# Altium PCB Power_Module_(Type-A).PcbDoc
Units mm, origin at the board's own origin, x right, y up, seen from the top; angles counter-clockwise.
Board outline 59.75 x 29 mm, 4 copper layers (L1 (Sig), L2 (GND), L3 (PWR), L4 (Sig)), stack 1.57 mm thick; 55 components, 25 nets, 271 pads, 150 vias.
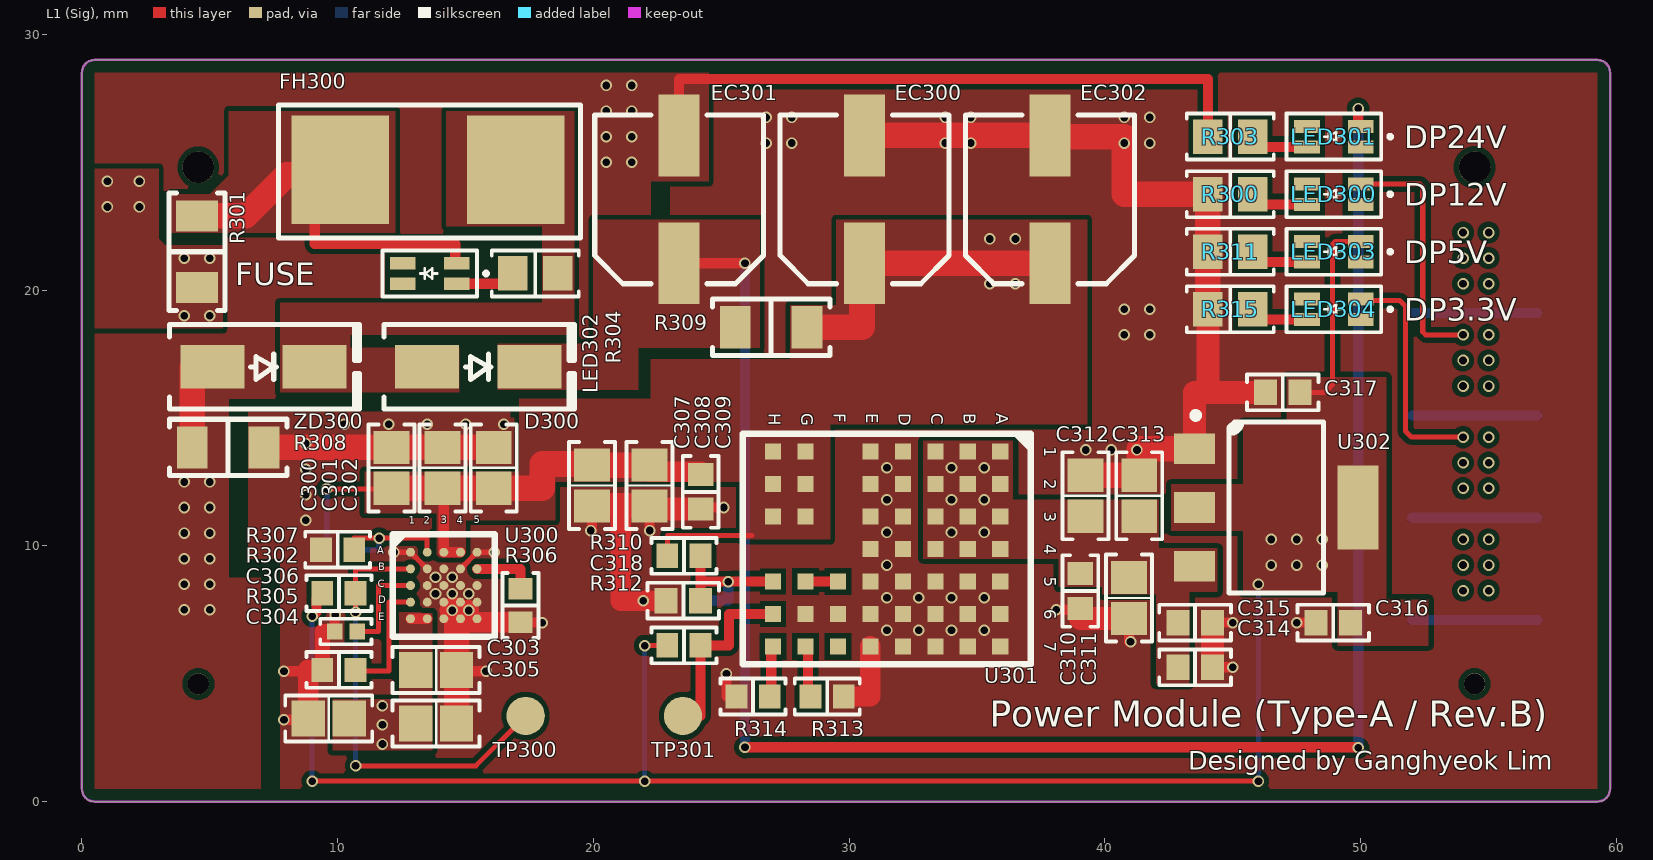
[diagram p0: L1 (Sig) view]
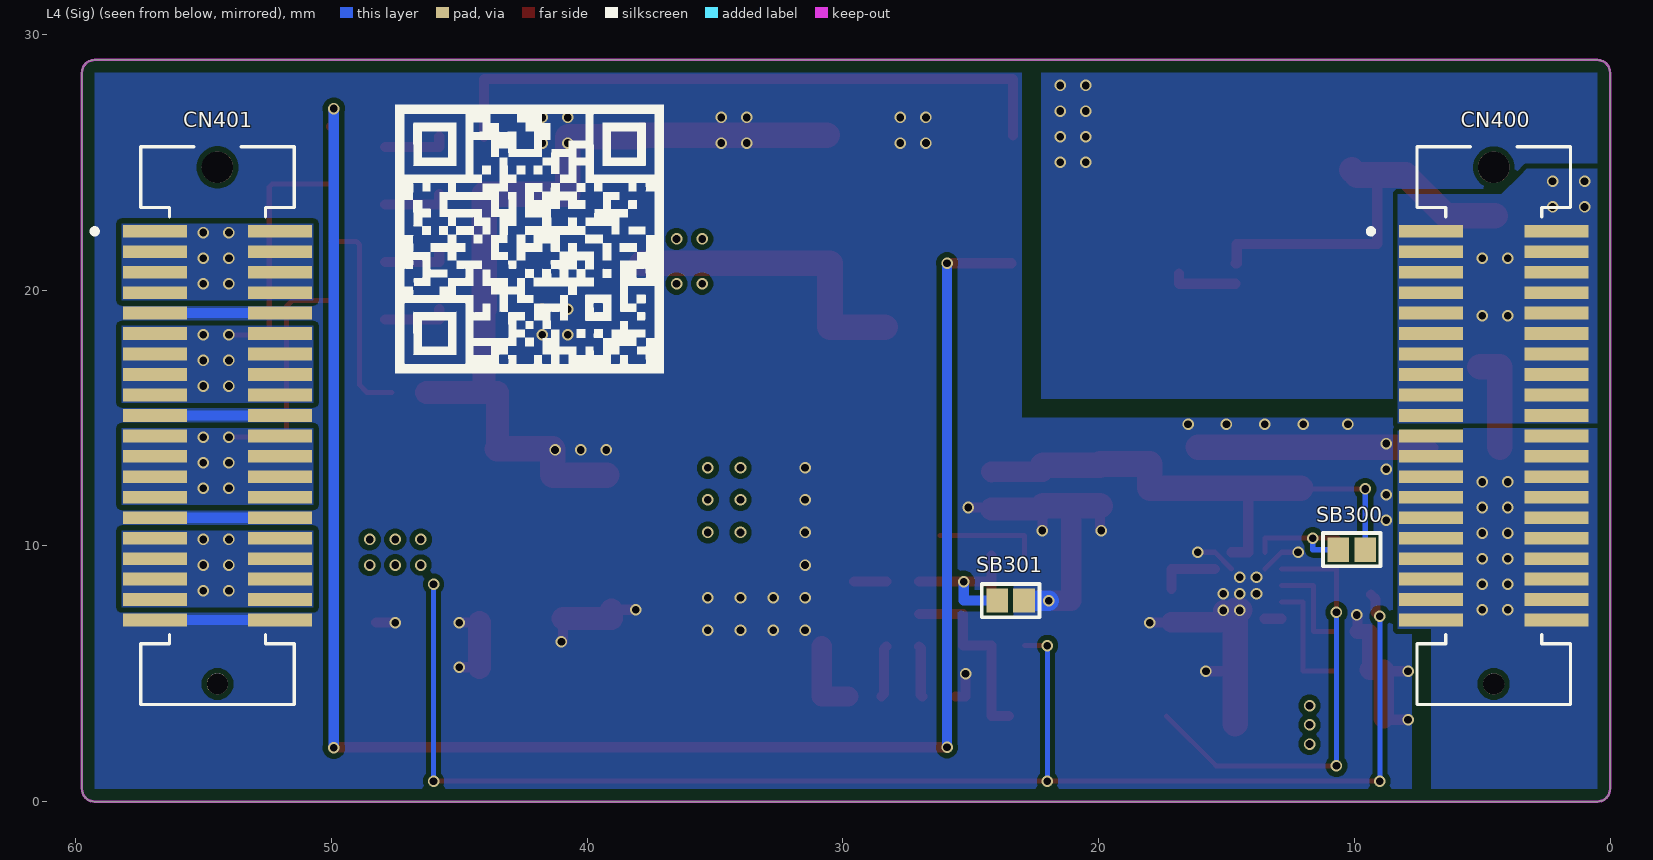
[diagram p1: L4 (Sig) view, seen from below]
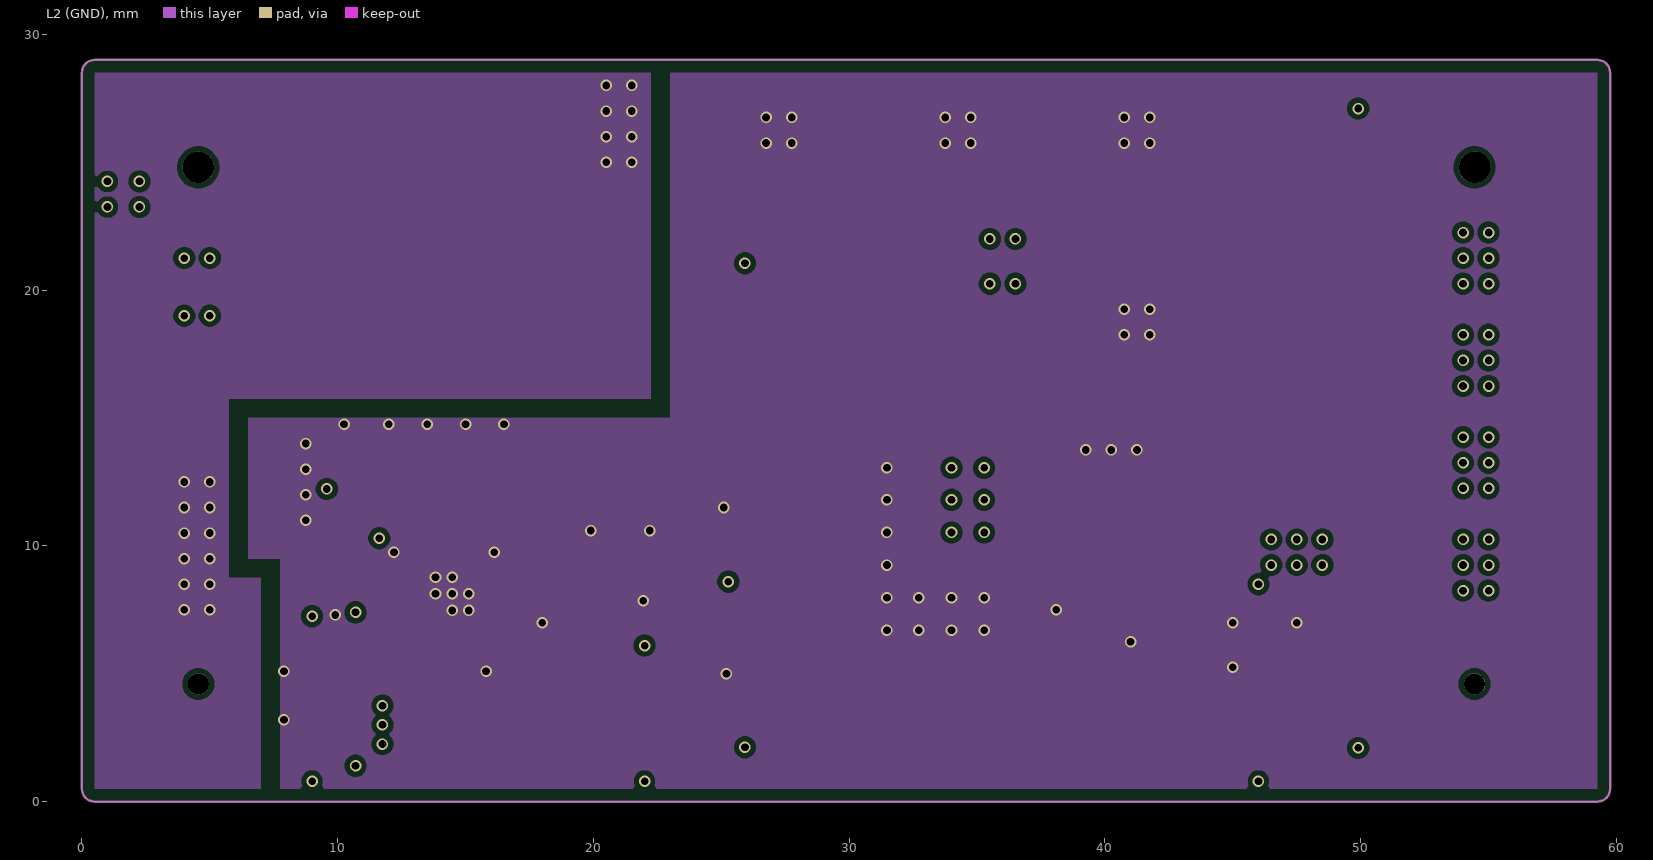
[diagram p2: L2 (GND)]
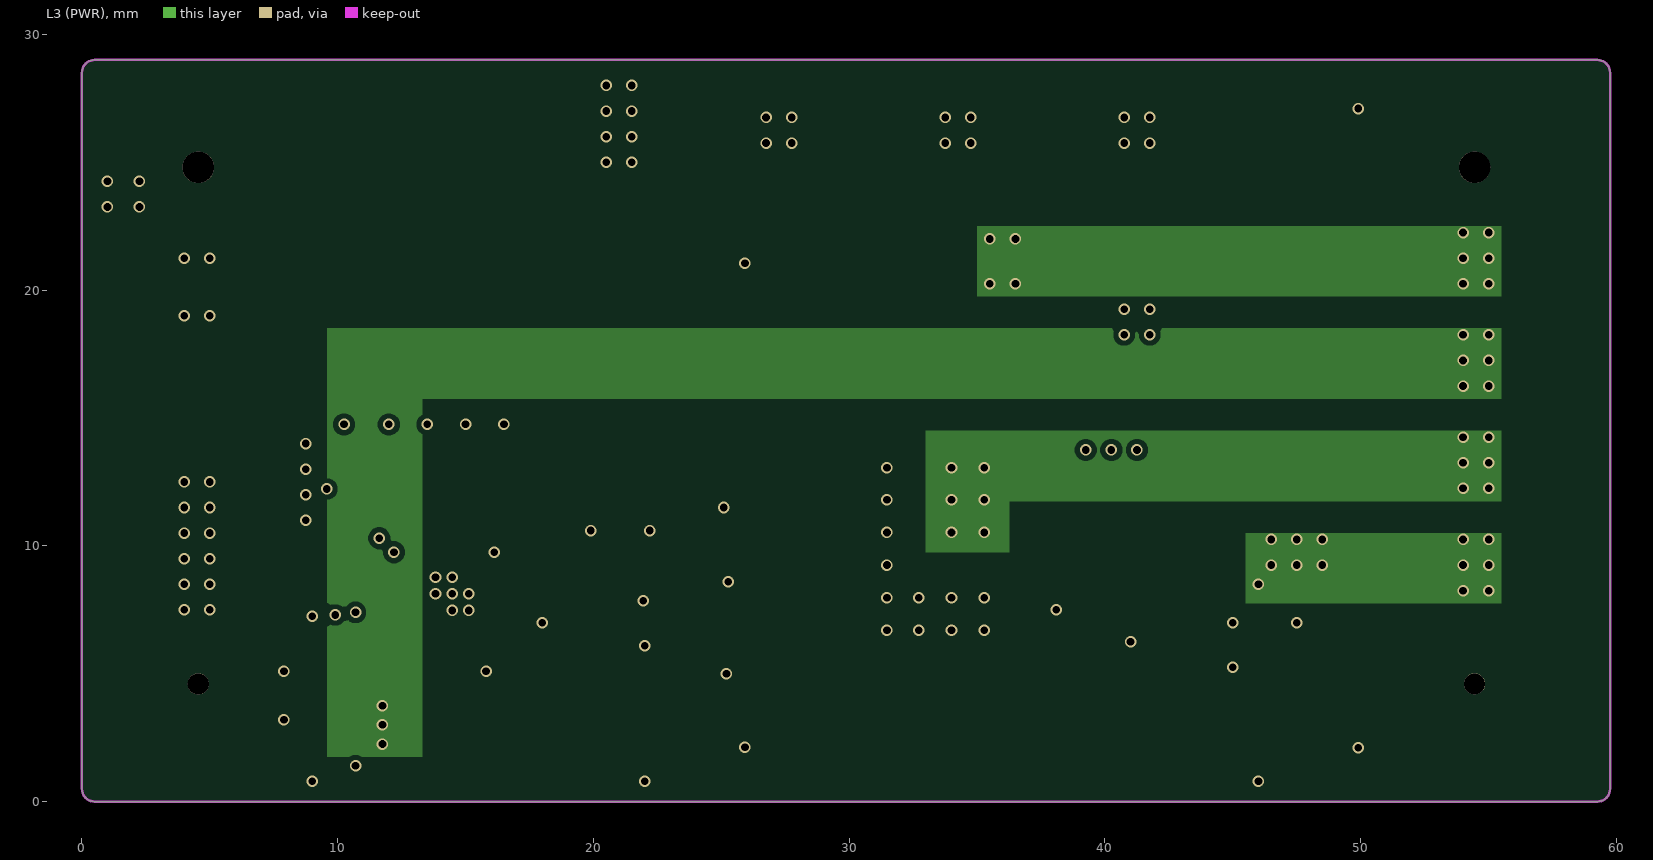
[diagram p3: L3 (PWR)]
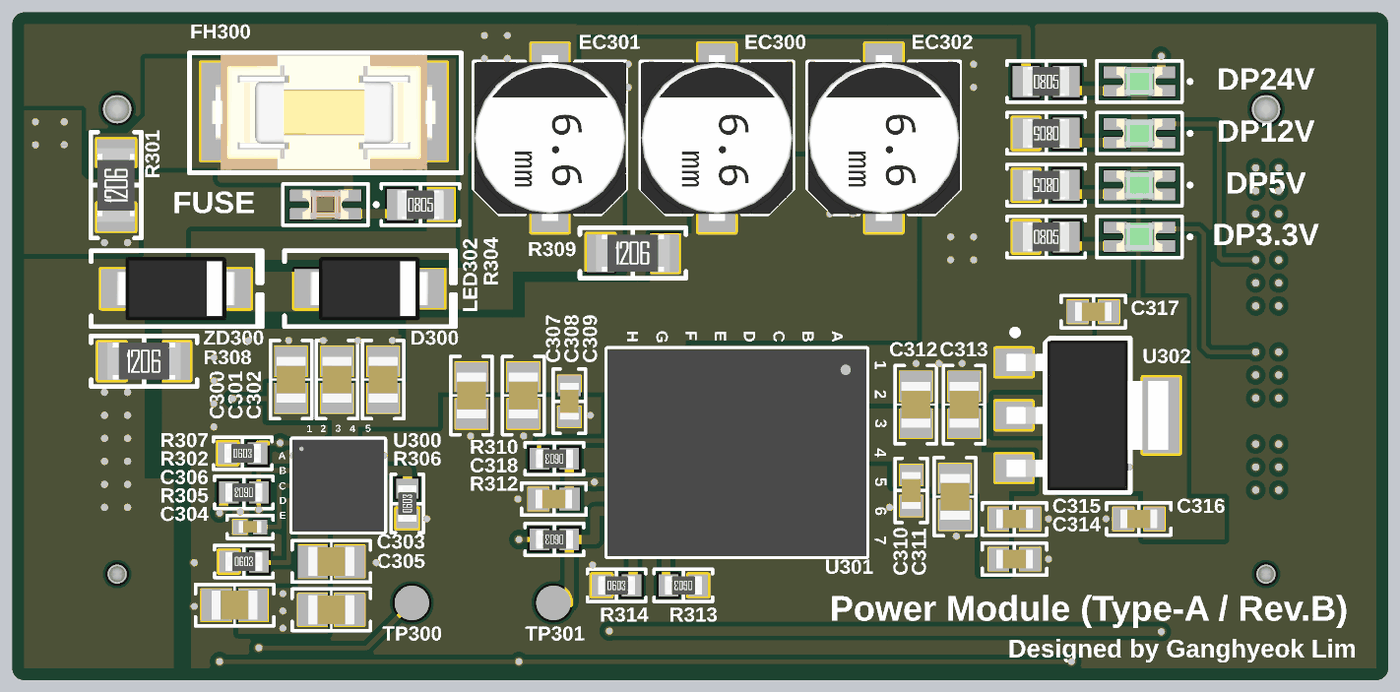
[diagram p4: 3D render of the assembled board from above, using the file's embedded part models]

## Layer stack, top to bottom
Top Mask: solder mask 0.015, Solder Resist, Dk 3.8
L1 (Sig): signal copper 0.035
Dielectric 1: prepreg 0.2, 7628, Dk 4.6
L2 (GND): signal copper 0.0175
Core: core 1.065, FR-4, Dk 4.5
L3 (PWR): signal copper 0.0175
Dielectric 2: prepreg 0.2, 7628, Dk 4.6
L4 (Sig): signal copper 0.035
Bottom Mask: solder mask 0.015, Solder Resist, Dk 3.8

## Board outline
0.5,0 cw(c0.5,0.5) 0,0.5 0,28.5 cw(c0.5,28.5) 0.5,29 59.25,29 cw(c59.25,28.5) 59.75,28.5 59.75,0.5 cw(c59.25,0.5) 59.25,0

## Design rules (kind name [scope] priority, off if disabled: settings)
BoardOutlineClearance [All] p1: gap=0.2 ignorepadtopadclearanceinfootprint=FALSE except(0.4: Arc-SplitBarrior Arc-SplitContinuation Track-SplitBarrior Track-SplitContinuation SMDPad-SplitBarrior SMDPad-SplitContinuation THPad-SplitBarrior THPad-SplitContinuation Via-SplitBarrior Via-SplitContinuation Fill-SplitBarrior Fill-SplitContinuation Poly-SplitBarrior Poly-SplitContinuation Region-SplitBarrior Region-SplitContinuation Text-SplitBarrior Text-SplitContinuation)
Clearance "Clearance Bottom Layer" [OnLayer('Bottom Layer')] p1: gap=0.203 ignorepadtopadclearanceinfootprint=TRUE except(0.254: Arc-Text Track-Text SMDPad-Text THPad-Text Via-Text Fill-Text Poly-Text Region-Text Text-Text)
Clearance "Clearance Top Layer" [OnLayer('Top Layer')] p2: gap=0.203 ignorepadtopadclearanceinfootprint=TRUE except(0.254: Arc-Text Track-Text SMDPad-Text THPad-Text Via-Text Fill-Text Poly-Text Region-Text Text-Text)
Clearance [All] p3: gap=0.2 ignorepadtopadclearanceinfootprint=FALSE except(0.089: Arc-Arc Arc-Track Arc-SMDPad Track-Track Track-SMDPad SMDPad-SMDPad; 0.127: Arc-Via Track-Via SMDPad-Via THPad-Via Via-Via; 0.254: Arc-Text Track-Text SMDPad-Text THPad-Text Via-Text Fill-Text Poly-Text Region-Text Text-Text)
HoleSize [All] p1: absolutevalues=TRUE maxlimit=6.3 minlimit=0.2 maxpercent=80.000 minpercent=20.000
MinimumAnnularRing [All] p1: minimumring=0.076
MinimumSolderMaskSliver [All] p1: minsoldermaskwidth=0.1
PolygonConnect FUSE_IN [InNet('FUSE_IN')] p1: connectstyle=Direct reliefconductorwidth=0.254 reliefentries=4 polygonreliefangle="90 Angle" airgapwidth=0.254
PolygonConnect P24VS_L1 [InNet('P24VS')] p2: connectstyle=Direct reliefconductorwidth=0.254 reliefentries=4 polygonreliefangle="90 Angle" airgapwidth=0.254
PolygonConnect FUSE_OUT [InNet('FUSE_OUT')] p3: connectstyle=Direct reliefconductorwidth=0.254 reliefentries=4 polygonreliefangle="90 Angle" airgapwidth=0.254
PolygonConnect GNDPWR [InNet('GNDPWR')] p4: connectstyle=Direct reliefconductorwidth=0.254 reliefentries=4 polygonreliefangle="90 Angle" airgapwidth=0.254
PolygonConnect IN24VS [InNet('IN24VS')] p5: connectstyle=Direct reliefconductorwidth=0.254 reliefentries=4 polygonreliefangle="90 Angle" airgapwidth=0.254
PolygonConnect DP12VS [InNet('DP12VS')] p6: connectstyle=Direct reliefconductorwidth=0.254 reliefentries=4 polygonreliefangle="90 Angle" airgapwidth=0.254
PolygonConnect DP3.3VS [InNet('DP3.3VS')] p7: connectstyle=Direct reliefconductorwidth=0.254 reliefentries=4 polygonreliefangle="90 Angle" airgapwidth=0.254
PolygonConnect DP5VS [InNet('DP5VS')] p8: connectstyle=Direct reliefconductorwidth=0.254 reliefentries=4 polygonreliefangle="90 Angle" airgapwidth=0.254
PolygonConnect DGND [InNet('DGND')] p9: connectstyle=Direct reliefconductorwidth=0.254 reliefentries=4 polygonreliefangle="90 Angle" airgapwidth=0.254
PolygonConnect DP24VS [InNet('DP24VS')] p10: connectstyle=Direct reliefconductorwidth=0.254 reliefentries=4 polygonreliefangle="90 Angle" airgapwidth=0.254
PolygonConnect [All] p11: thpad.connectstyle=Relief thpad.reliefconductorwidth=0.508 thpad.reliefentries=4 thpad.polygonreliefangle="90 Angle" thpad.airgapwidth=0.254 smdpad.connectstyle=Relief smdpad.reliefconductorwidth=0.508 smdpad.reliefentries=4 smdpad.polygonreliefangle="90 Angle" smdpad.airgapwidth=0.254 via.connectstyle=Direct via.reliefconductorwidth=0.508 via.reliefentries=4 via.polygonreliefangle="90 Angle" via.airgapwidth=0.254
RoutingCorners [All] p1: cornerstyle=Round minsetback=2.54 maxsetback=2.54
RoutingVias [All] p1: holewidth=0.3 width=0.45 viastyle="Through Hole" minholewidth=0.15 minwidth=0.3 maxholewidth=1 maxwidth=2
SilkToSilkClearance [All] p1: silktosilkclearance=0.1
SilkToSolderMaskClearance [IsPad] p1: minsilkscreentomaskgap=0.1 clearancetoexposedcopper=TRUE
SolderMaskExpansion [All] p1: expansion=0.102 istentingtop=FALSE
Width [All] p1: maxlimit=2 minlimit=0.1 preferedwidth=0.2
25 further rules are at their usual default settings.

## Components (designator, comment, footprint, x,y, rotation, side; value= is the part's Value field where it differs from the comment)
C300 "10uF/50V/2012" "CAP 2012 (0805_INCH)" 12.1,13.05 r270 top
C301 "2.2uF/50V/2012" "CAP 2012 (0805_INCH)" 14.1,13.05 r270 top
C302 "100nF/50V/2012" "CAP 2012 (0805_INCH)" 16.1,13.05 r270 top
C303 "100nF/50V/2012" "CAP 2012 (0805_INCH)" 13.85,5.15 r180 top
C304 "2.2uF/50V/2012" "CAP 2012 (0805_INCH)" 9.65,3.25 r0 top
C305 "10uF/50V/2012" "CAP 2012 (0805_INCH)" 13.85,3.05 r180 top
C306 "100nF/16V/1005" "CAP 1005 (0402_INCH)" 10.32,6.65 r0 top
C307 "10uF/35V/2012" "CAP 2012 (0805_INCH)" 19.94,12.36 r90 top
C308 "2.2uF/50V/2012" "CAP 2012 (0805_INCH)" 22.19,12.36 r90 top
C309 "100nF/50V/1608" "CAP 1608 (0603_INCH)" 24.19,12.11 r90 top
C310 "100nF/50V/1608" "CAP 1608 (0603_INCH)" 39.04,8.235 r90 top
C311 "10uF/35V/2012" "CAP 2012 (0805_INCH)" 40.94,7.96 r90 top
C312 "10uF/35V/2012" "CAP 2012 (0805_INCH)" 39.24,11.96 r270 top
C313 "10uF/35V/2012" "CAP 2012 (0805_INCH)" 41.34,11.96 r270 top
C314 "10uF/10V/1608" "CAP 1608 (0603_INCH)" 43.525,5.25 r180 top
C315 "100nF/50V/1608" "CAP 1608 (0603_INCH)" 43.525,7 r180 top
C316 "100nF/50V/1608" "CAP 1608 (0603_INCH)" 48.925,7 r0 top
C317 "10uF/10V/1608" "CAP 1608 (0603_INCH)" 46.95,16 r0 top
C318 "100nF/50V/1608" "CAP 1608 (0603_INCH)" 23.515,7.86 r0 top
CN400 "10144517-041802LF" CON_BergStak-Lite(0.8mm)_MALE-40P(10144517-041802LF)_HandSolder 4.55,14.7 r90 bottom locked
CN401 "10144517-041802LF" CON_BergStak-Lite(0.8mm)_MALE-40P(10144517-041802LF)_HandSolder 54.45,14.7 r90 bottom locked
D300 "SS34" "DIO DO-214AC (SMA)" 15.5,17 r0 top
EC300 "100uF/35V/6.3Øx7.7" "CAP ALSMD 6.6MM H7.7MM" 30.6,23.55 r90 top
EC301 "100uF/35V/6.3Øx7.7" "CAP ALSMD 6.6MM H7.7MM" 23.35,23.55 r90 top
EC302 "100uF/35V/6.3Øx7.7" "CAP ALSMD 6.6MM H7.7MM" 37.85,23.55 r90 top
FH300 "01550900M" "FUSE 01550900M_SMD" 10.1,24.7 r0 top
LED300 "GREEN/2012" "LED MHT170RGBCT (GREEN)" 48.95,23.75 r180 top
LED301 "GREEN/2012" "LED MHT170RGBCT (GREEN)" 48.95,26 r180 top
LED302 "RED/2012" "LED MHT170RGBCT (RED)" 13.6,20.65 r180 top
LED303 "GREEN/2012" "LED MHT170RGBCT (GREEN)" 48.95,21.5 r180 top
LED304 "GREEN/2012" "LED MHT170RGBCT (GREEN)" 48.95,19.25 r180 top
R300 "680R/2012" "RES 2012 (0805_inch)" 44.9,23.75 r180 top value=680R
R301 "0R/3216" "RES 3216 (1206_inch)" 4.5,21.5 r90 top
R302 "100K/1608" "RES 1608 (0603_inch)" 10.05,8.15 r180 top value=100K
R303 "4.7K/2012" "RES 2012 (0805_inch)" 44.9,26 r0 top value=4.7K
R304 "4.7K/2012" "RES 2012 (0805_inch)" 17.725,20.65 r0 top value=4.7K
R305 "17.4K/1608" "RES 1608 (0603_inch)" 10.05,5.15 r0 top value=17.4K
R306 "18.2K/1608" "RES 1608 (0603_inch)" 17.15,7.668 r90 top value=18.2K
R307 "10K/1608" "RES 1608 (0603_inch)" 10,9.85 r0 top value=10K
R308 "0R/3216" "RES 3216 (1206_inch)" 5.717,13.85 r0 top
R309 "0R/3216" "RES 3216 (1206_inch)" 26.95,18.55 r0 top
R310 "15K/1608" "RES 1608 (0603_inch)" 23.54,9.61 r180 top value=15K
R311 "330R/2012" "RES 2012 (0805_inch)" 44.9,21.5 r180 top value=330R
R312 "100K/1608" "RES 1608 (0603_inch)" 23.54,6.11 r180 top value=100K
R313 "39.2K/1608" "RES 1608 (0603_inch)" 29.14,4.11 r180 top value=39.2K
R314 "93.1K/1608" "RES 1608 (0603_inch)" 26.24,4.11 r0 top value=93.1K
R315 "680R/2012" "RES 2012 (0805_inch)" 44.9,19.25 r0 top value=680R
SB300 "SB" "SB (Solder-Bridge)" 10.1,9.85 r180 bottom
SB301 "SB" "SB (Solder-Bridge)" 23.44,7.86 r0 bottom
TP300 "TP_CIRCLE" "TP Circle" 17.35,3.35 r90 top
TP301 "TP_CIRCLE" "TP Circle" 23.5,3.35 r90 top
U300 "LTM8074IY#PBF" IC_BGA-25 14.15,8.45 r270 top
U301 "LTM8023EV#PBF" "LGA-50 (LTM8023EV#PBF)" 31.465,9.88 r180 top
U302 "AMS1117-3.3" "SOT 223-3 (DIODES INCORPORATED)" 46.7,11.5 r0 top
ZD300 "SMAJ24A" "DIO DO-214AC (SMA)" 7.1,17 r0 top

## Footprints (in the part's own frame and the unit in brackets; to place one, negate y for a bottom-side part, rotate by r counter-clockwise, add the part's x,y. Pads: shape width x height; smd on the part's side, far side on the other; paste and mask are expansions set on the pad)
"CAP 1005 (0402_INCH)" [mm] "Chip Capacitor, 2-Leads, Body 1.02x0.51mm, IPC Medium Density"
  rect 0.6x0.64 smd mask+0.04: 1(-0.44,0) 2(0.44,0)
  silkscreen extent -1,-0.5 1,0.5, body extent -0.5,-0.26 0.5,0.26, height 0.52
"CAP 1608 (0603_INCH)" [mm] "Chip Capacitor, 2-Leads, Body 1.60x0.80mm, IPC Medium Density"
  rect 0.9x1 smd mask+0.04: 1(-0.675,0) 2(0.675,0)
  silkscreen extent -1.4,-0.7 1.4,0.7, body extent -0.8,-0.41 0.8,0.41, height 0.82
"CAP 2012 (0805_INCH)" [mm] "Chip Capacitor, 2-Leads, Body 2.00x1.20mm, IPC Medium Density"
  rect 1.3x1.4 smd mask+0.04: 1(-0.8,0) 2(0.8,0)
  silkscreen extent -1.7,-0.9 1.7,0.9, body extent -1,-0.64 1,0.64, height 1.26
"CAP ALSMD 6.6MM H7.7MM" [mm] "Aluminum Electrolytic Capacitor, Body 6.60x6.60x7.70mm, IPC Low Density"
  rect 3.2x1.6 smd: 1(-2.5,0) 2(2.5,0)
  silkscreen extent -3.3,-3.3 3.3,3.3, body extent -3.6,-3.3 3.6,3.3, height 7.7
CON_BergStak-Lite(0.8mm)_MALE-40P(10144517-041802LF)_HandSolder [mm]
  rect 0.5x2.5 smd: 1(7.6,2.45) 2(7.6,-2.45) 3(6.8,2.45) 4(6.8,-2.45) 5(6,2.45) 6(6,-2.45) 7(5.2,2.45) 8(5.2,-2.45) 9(4.4,2.45) 10(4.4,-2.45) 11(3.6,2.45) 12(3.6,-2.45) 13(2.8,2.45) 14(2.8,-2.45) 15(2,2.45) 16(2,-2.45) 17(1.2,2.45) 18(1.2,-2.45) 19(0.4,2.45) 20(0.4,-2.45) 21(-0.4,2.45) 22(-0.4,-2.45) 23(-1.2,2.45) 24(-1.2,-2.45) 25(-2,2.45) 26(-2,-2.45) 27(-2.8,2.45) 28(-2.8,-2.45) 29(-3.6,2.45) 30(-3.6,-2.45) 31(-4.4,2.45) 32(-4.4,-2.45) 33(-5.2,2.45) 34(-5.2,-2.45) 35(-6,2.45) 36(-6,-2.45) 37(-6.8,2.45) 38(-6.8,-2.45) 39(-7.6,2.45) 40(-7.6,-2.45)
  round 0.83 hole 0.83 unplated: ""(-10.1,0)
  round 1.23 hole 1.23 unplated: ""(10.1,0)
  silkscreen extent -10.9,-3 10.9,4.9, body extent -10.9,-3 10.9,3, height 3.65
"DIO DO-214AC (SMA)" [mm] "Molded Diode, 2-Leads, Body 4.30x2.60mm, IPC Medium Density"
  rect 2.5x1.7 smd: 1(-2,0) 2(2,0)
  silkscreen extent -3.68,-1.65 3.75,1.65, body extent -2.6,-1.37 2.6,1.37, height 2.4
"FUSE 01550900M_SMD" [mm] "Fuse Holder"
  rect 3.81x4.24 smd: 1(0,0) 2(6.858,0)
  silkscreen extent -2.41,-2.67 9.4,2.54, body extent -1.42,-2.54 8.28,2.46, height 3.74
IC_BGA-25 [mm] "BGA Package  25-Lead (4mm 占쏙옙 4mm 占쏙옙 1.82mm)"
  round 0.35 smd mask+0.05: A1(-1.3,-1.3) A2(-1.3,-0.65) A3(-1.3,0) A4(-1.3,0.65) A5(-1.3,1.3) B1(-0.65,-1.3) B2(-0.65,-0.65) B3(-0.65,0) B4(-0.65,0.65) B5(-0.65,1.3) C1(0,-1.3) C2(0,-0.65) C3(0,0) C4(0,0.65) C5(0,1.3) D1(0.65,-1.3) D2(0.65,-0.65) D3(0.65,0) D4(0.65,0.65) D5(0.65,1.3) E1(1.3,-1.3) E2(1.3,-0.65) E3(1.3,0) E4(1.3,0.65) E5(1.3,1.3)
  silkscreen extent -2,-2 2,2, body extent -1.99,-1.99 1.99,1.99, height 1.98
"LED MHT170RGBCT (GREEN)" [mm] "Colorless transparence -30占쏙옙~+85占쏙옙 Positive post Common anode RGB 120占쏙옙 0805  Light Emitting Diodes (LED) ROHS"
  rect 1x0.5 smd mask+0.04: 1(-1.05,0.4) 2(1.05,0.4) 3(1.05,-0.4) 4(-1.05,-0.4)
  silkscreen extent -2.25,-0.9 1.85,0.9, body extent -1,-0.62 1,0.62, height 0.9
"LED MHT170RGBCT (RED)" [mm] "Colorless transparence -30占쏙옙~+85占쏙옙 Positive post Common anode RGB 120占쏙옙 0805  Light Emitting Diodes (LED) ROHS"
  rect 1x0.5 smd mask+0.04: 1(-1.05,0.4) 2(1.05,0.4) 3(1.05,-0.4) 4(-1.05,-0.4)
  silkscreen extent -2.25,-0.9 1.85,0.9, body extent -1,-0.62 1,0.62, height 0.9
"LGA-50 (LTM8023EV#PBF)" [mm] "LGA 50-Lead (11.25mm 占쏙옙 9.00mm 占쏙옙 2.82mm)"
  rect 0.635x0.635 smd: A1(-4.445,-3.81) A2(-4.445,-2.54) A3(-4.445,-1.27) A4(-4.445,0) A5(-4.445,1.27) A6(-4.445,2.54) A7(-4.445,3.81) B1(-3.175,-3.81) B2(-3.175,-2.54) B3(-3.175,-1.27) B4(-3.175,0) B5(-3.175,1.27) B6(-3.175,2.54) B7(-3.175,3.81) C1(-1.905,-3.81) C2(-1.905,-2.54) C3(-1.905,-1.27) C4(-1.905,0) C5(-1.905,1.27) C6(-1.905,2.54) C7(-1.905,3.81) D1(-0.635,-3.81) D2(-0.635,-2.54) D3(-0.635,-1.27) D4(-0.635,0) D5(-0.635,1.27) D6(-0.635,2.54) D7(-0.635,3.81) E1(0.635,-3.81) E2(0.635,-2.54) E3(0.635,-1.27) E4(0.635,0) E5(0.635,1.27) E6(0.635,2.54) E7(0.635,3.81) F5(1.905,1.27) F6(1.905,2.54) F7(1.905,3.81) G1(3.175,-3.81) G2(3.175,-2.54) G3(3.175,-1.27) G5(3.175,1.27) G6(3.175,2.54) G7(3.175,3.81) H1(4.445,-3.81) H2(4.445,-2.54) H3(4.445,-1.27) H5(4.445,1.27) H6(4.445,2.54) H7(4.445,3.81)
  silkscreen extent -5.65,-4.55 5.63,4.5, body extent -5.63,-4.5 5.63,4.5, height 2.98
"RES 1608 (0603_inch)" [mm] "Chip Resistor, 2-Leads, Body 1.60x0.80mm, IPC Medium Density"
  rect 0.85x0.95 smd: 1(-0.65,0) 2(0.65,0)
  silkscreen extent -1.27,-0.7 1.27,0.7, body extent -0.8,-0.4 0.8,0.4, height 0.45
"RES 2012 (0805_inch)" [mm] "Chip Resistor, 2-Leads, Body 2.00x1.25mm, IPC Medium Density"
  rect 1.15x1.35 smd: 1(-0.875,0) 2(0.875,0)
  silkscreen extent -1.7,-0.9 1.7,0.9, body extent -1,-0.62 1,0.63, height 0.6
"RES 3216 (1206_inch)" [mm] "Chip Resistor, 2-Leads, Body 3.13x1.55mm, IPC Medium Density"
  rect 1.2x1.65 smd: 1(-1.4,0) 2(1.4,0)
  silkscreen extent -2.3,-1.1 2.3,1.1, body extent -1.6,-0.8 1.6,0.8, height 0.6
"SB (Solder-Bridge)" [mm] "SB (Solder-Bridge)"
  rect 0.85x0.95 smd mask+0.038: 1(-0.525,0) 2(0.525,0)
  silkscreen extent -1.12,-0.65 1.12,0.65
"SOT 223-3 (DIODES INCORPORATED)" [mm] "SOT223, 4-Leads, Body 6.50x7.00mm (avg), Pitch 2.30mm, IPC Medium Density"
  rect 1.6x1.2 smd: 1(-3.2,2.3) 2(-3.2,0) 3(-3.2,-2.3)
  rect 1.6x3.3 smd: 4(3.2,0)
  silkscreen extent -3.27,-3.35 1.85,3.72, body extent -3.52,-3.25 3.5,3.25, height 1.8
"TP Circle" [mm] "Test Point Circle"
  round 1.5 smd: 1(0,0)

## Part data
C300 C305: library part CAP_10uF/50V/2012, "Ceramic CAP_10uF/50V/2012", JLCPCB Part Type="Basic Part", LCSC Part #=C440198
C301 C304 C308: library part CAP_2.2uF/50V/2012, "Ceramic CAP_2.2uF/50V/2012", JLCPCB Part Type="Basic Part", LCSC Part #=C377773
C302 C303: library part CAP_100nF/50V/2012, "Ceramic CAP_100nF/50V/2012", JLCPCB Part Type="Basic Part", LCSC Part #=C49678
C306: library part CAP_100nF/16V/1005, "Ceramic CAP_100nF/16V/1005", JLCPCB Part Type="Basic Part", LCSC Part #=C1525
C307 C311 C312 C313: library part CAP_10uF/35V/2012, "Ceramic CAP_10uF/35V/2012", JLCPCB Part Type="Basic Part", LCSC Part #=C440198
C309 C310 C315 C316 C318: library part CAP_100nF/50V/1608, "Ceramic CAP_100nF/50V/1608", JLCPCB Part Type="Basic Part", LCSC Part #=C14663
C314 C317: library part CAP_10uF/10V/1608, "Ceramic CAP_10uF/10V/1608", JLCPCB Part Type="Basic Part", LCSC Part #=C19702
CN400 CN401: library part CON_BergStak-Lite(0.8mm)_MALE-40P(10144517-041802LF), JLCPCB Part Type="Extended Part"
D300: library part DIO_SS34, "DIODE SCHOTTKY 40V 3A SMC", JLCPCB Part Type="Basic Part", LCSC Part #=C8678
EC300 EC301 EC302: library part "CAP_EC 100uF/35V/6.3Øx7.7", "Eletrolytic CAP_100uF/35V/6.3Øx7.7", JLCPCB Part Type="Extended Part", LCSC Part #=C176666
FH300: library part FUSE_01550900M-SMD, "Fuse Block 10A 125V 1 Circuit Cartridge Surface Mount", JLCPCB Part Type="Extended Part", LCSC Part #=C108518
LED300 LED301 LED303 LED304: library part LED_MHT170RGBCT(GREEN), "Colorless transparence -30℃~+85℃ Positive post Common anode RGB 120° 0805  Light Emitting Diodes (LED) ROHS", JLCPCB Part Type="Extended Part", LCSC Part #=C2962094
LED302: library part LED_MHT170RGBCT(RED), "Colorless transparence -30℃~+85℃ Positive post Common anode RGB 120° 0805  Light Emitting Diodes (LED) ROHS", JLCPCB Part Type="Extended Part", LCSC Part #=C2962094
R300 R315: library part RES_680R/2012/0.125W, "RES_680R/2012/0.125W", JLCPCB Part Type="Basic Part", LCSC Part #=C17798, Power Rating=0.125W, Precision=1%, Size=2012
R301 R308 R309: library part RES_0R/3216/0.25W, "RES_0R/3216/0.25W", JLCPCB Part Type="Basic Part", LCSC Part #=C17888, Power Rating=0.1W, Precision=1%, Size=1608
R302 R312: library part RES_100K/1608/0.1W, "RES_100K/1608/0.1W", JLCPCB Part Type="Basic Part", LCSC Part #=C25803, Power Rating=0.1W, Precision=1%, Size=1608
R303 R304: library part RES_4.7K/2012/0.125W, "RES_4.7K/2012/0.125W", JLCPCB Part Type="Basic Part", LCSC Part #=C17673, Power Rating=0.125W, Precision=1%, Size=2012
R305: library part RES_17.4K/1608/0.1W, "RES_17.4K/1608/0.1W", JLCPCB Part Type="Extended Part", LCSC Part #=C185365, Power Rating=0.1W, Precision=1%, Size=1608
R306: library part RES_18.2K/1608/0.1W, "RES_18.2K/1608/0.1W", JLCPCB Part Type="Extended Part", LCSC Part #=C170492, Power Rating=0.1W, Precision=1%, Size=1608
R307: library part RES_10K/1608/0.1W, "RES_10K/1608/0.1W", JLCPCB Part Type="Basic Part", LCSC Part #=C25804, Power Rating=0.1W, Precision=1%, Size=1608
R310: library part RES_15K/1608/0.1W, "RES_15K/1608/0.1W", JLCPCB Part Type="Basic Part", LCSC Part #=C22809, Power Rating=0.1W, Precision=1%, Size=1608
R311: library part RES_330R/2012/0.125W, "RES_330R/2012/0.125W", JLCPCB Part Type="Basic Part", LCSC Part #=C17630, Power Rating=0.125W, Precision=1%, Size=2012
R313: library part RES_39.2K/1608/0.1W, "RES_39.2K/1608/0.1W", JLCPCB Part Type="Extended Part", LCSC Part #=C137734, Power Rating=0.1W, Precision=1%, Size=1608
R314: library part RES_93.1K/1608/0.1W, "RES_93.1K/1608/0.1W", JLCPCB Part Type="Extended Part", LCSC Part #=C228101, Power Rating=0.1W, Precision=1%, Size=1608
SB300 SB301: library part SB_Solder-Bridge, "SB_Solder-Bridge"
U300: library part IC_REG_LTM8074IY#PBF, "1.2A, 40V DC/DC Buck Module Reg", JLCPCB Part Type="Extended Part", LCSC Part #=C690772
U301: library part IC_REG_LTM8023EV#PBF, "2A, 36V DC/DC Buck Module Reg", JLCPCB Part Type="Extended Part", LCSC Part #=C108022, ComponentLink1Description=Datasheet, ComponentLink1URL=https://www.mouser.kr/datasheet/2/609/8023fj-2488599.pdf
U302: library part IC_REG_AMS1117-3.3, "72dB@(120Hz) 1A 1.3V@(800mA) Fixed 3.3V~3.3V Positive 1 SOT-223  Linear Voltage Regulators (LDO) ROHS", JLCPCB Part Type="Basic Part", LCSC Part #=C6186
ZD300: library part DIO_SMAJ24A, "Rectifier Diode", JLCPCB Part Type="Extended Part", LCSC Part #=C113962

## Via types
v1: diameter 0.45, hole 0.3, L1 (Sig) to L4 (Sig), tented both sides, 150 vias

## Nets (pads, with @x,y where several pads share a name; then routed paths per layer and width w, separated by ;. In a path a pad name is that pad's centre, name@x,y a point inside that pad or via, vN(x,y) a via of type N, cw(c..) or ccw(c..) an arc to the next point about the centre after c; other vN are vias at no path point)
DGND: C300.1 C301.1 C302.1 C303.1 C304.1 C305.1 C306.1 C307.1 C308.1 C309.1 C310.1 C311.1 C312.1 C313.1 C314.1 C315.1 C316.1 C317.1 C318.1 CN401.9 CN401.10 CN401.19 CN401.20 CN401.29 CN401.30 CN401.39 CN401.40 EC300.2 EC302.2 R300.2 R305.1 R306.1 R307.1 R308.2 R311.2 R313.1 R314.1 R315.1 SB301.1 U300.A1 U300.A5 U300.B2 U300.B3 U300.B4 U300.C2 U300.C3 U300.C4 U300.C5 U300.D2 U300.D3 U300.D4 U300.D5 U300.E3 U300.E4 U300.E5 U301.A5 U301.A6 U301.A7 U301.B5 U301.B6 U301.B7 U301.C5 U301.C6 U301.C7 U301.D1 U301.D2 U301.D3 U301.D4 U301.D5 U301.D6 U301.D7 U301.E1 U301.E2 U301.E3 U301.E4 U301.E5 U301.E6 U301.E7 U301.F6 U301.G6 U302.1 | length 108.2
  L1 (Sig) w0.2: v1(12.2,9.75) U300.A1 U300.B2 ; U300.B4 U300.A5 v1(16.125,9.75)
  L1 (Sig) w0.4: R308.2@6.9,13.85 R308.2 R308.2@7.6,13.85 ; v1(7.9,3.2) 8.85,3.2 C304.1 ; v1(7.9,5.1) 8.85,5.1 8.85,5.15 ; R307.1@9.35,9.8 R307.1 ; C306.1 9.88,7.3 v1(9.9,7.3) ; C303.1 14.65,5.1 v1(15.8,5.1) ; R306.1 17.15,7 v1(18,7) ; v1(19.9,10.6) 19.94,10.6 C307.1 ; C308.1@22.19,11.435 22.19,10.6 v1(22.2,10.6) ; C309.1 24.19,11.5 v1(25.1,11.5) ; v1(25.2,5) 25.2,4.11 R314.1 ; v1(38.1,7.5) 39.04,7.5 C310.1 ; C312.1 C312.1@39.24,12.8 ; C311.1 40.94,6.25 v1(41,6.25) ; C314.1 v1(45,5.25) ; C315.1 v1(45,7) ; v1(47.5,7) C316.1
  L1 (Sig) w0.6: R305.1 9.4,6.65 C306.1
  L1 (Sig) w0.8: C304.1 8.85,5.1 ; 8.85,5.15 R305.1 ; v1(15.125,7.475) 15.125,7.018 R306.1 ; 21.065,11.56 21.065,7.86 v1(21.952,7.86) C318.1 ; R313.1 30.83,4.11 U301.E7
  L1 (Sig) w0.9: C308.1 22.19,11.435 C309.1 ; C310.1@39.04,7.5 39.04,7.16 C311.1 ; U302.1 43.5,16 44.025,16 ; R315.1 44.025,16 ; C314.1 C315.1 ; C317.1 44.025,16
  L1 (Sig) w1: R308.2@7.6,13.85 C300.1 C301.1 C302.1 ; v1(14.475,7.475) 14.65,7.475 C303.1 ; C305.1 C303.1@14.65,5.1 ; C307.1 21.065,11.56 C308.1 ; EC300.2 EC302.2 37.85,26 40.75,26 40.75,23.75 R300.2 R311.2 R315.1 ; C312.1 C313.1 41.34,13.8 U302.1
  L4 (Sig) w0.4: CN401.40 CN401.39 ; CN401.30 CN401.29 ; CN401.20 CN401.19 ; CN401.10 CN401.9
  L4 (Sig) w0.8: v1(21.952,7.86) SB301.1
  other v1: 31.475,6.7 32.725,6.7 34,6.7 35.275,6.7 31.475,7.975 32.725,7.975 34,7.975 35.275,7.975 13.825,8.125 14.475,8.125 15.125,8.125 13.825,8.775 14.475,8.775 31.475,9.25 31.475,10.525 8.75,11 31.475,11.8 8.75,12 8.75,13 31.475,13.05 39.25,13.75 40.25,13.75 41.25,13.75 8.75,14 10.25,14.75 12,14.75 13.5,14.75 15,14.75 16.5,14.75 40.75,18.25 41.75,18.25 40.75,19.25 41.75,19.25 26.75,25.75 27.75,25.75 33.75,25.75 34.75,25.75 40.75,25.75 41.75,25.75 26.75,26.75 27.75,26.75 33.75,26.75 34.75,26.75 40.75,26.75 41.75,26.75
DP3.3VS: C316.2 C317.2 CN401.31 CN401.32 CN401.33 CN401.34 CN401.35 CN401.36 CN401.37 CN401.38 LED303.4 R302.2 R312.2 U302.2 U302.4 | length 66.4
  L1 (Sig) w0.2: v1(9,0.8) v1(22,0.8) v1(46,0.8) ; R302.2@9.35,8.1 R302.2 ; v1(22,6.1) 22,6.11 R312.2 ; C317.2 48.6,16 48.9,16.3 48.9,21.783 49.017,21.9 LED303.4
  L1 (Sig) w0.4: v1(9,7.25) 9.175,7.425 9.175,7.925 R302.2@9.35,8.1
  L4 (Sig) w0.2: v1(9,0.8) v1(9,7.25) ; v1(22,0.8) v1(22,6.1) ; v1(46,0.8) v1(46,8.5)
  other v1: 54,8.25 55,8.25 46.5,9.25 47.5,9.25 48.5,9.25 54,9.25 55,9.25 46.5,10.25 47.5,10.25 48.5,10.25 54,10.25 55,10.25
DP5VS: C310.2 C311.2 C312.2 C313.2 C314.2 C315.2 CN401.21 CN401.22 CN401.23 CN401.24 CN401.25 CN401.26 CN401.27 CN401.28 LED304.4 U301.A1 U301.A2 U301.A3 U301.A4 U301.B1 U301.B2 U301.B3 U301.B4 U301.C1 U301.C2 U301.C3 U301.C4 U302.3 | length 9.1
  L1 (Sig) w0.2: LED304.4@50,19.6 LED304.4 50.05,19.6 51.516,19.6 51.75,19.366 51.75,14.484 51.984,14.25 v1(54,14.25)
  other v1: 34,10.525 35.275,10.525 34,11.8 35.275,11.8 54,12.25 55,12.25 34,13.05 35.275,13.05 54,13.25 55,13.25 55,14.25
DP12VS: C303.2 C304.2 C305.2 CN401.11 CN401.12 CN401.13 CN401.14 CN401.15 CN401.16 CN401.17 CN401.18 LED300.4 U300.E1 U300.E2 | length 10.4
  L1 (Sig) w0.2: LED300.4 52.306,24.15 52.424,24.033 52.424,18.367 52.541,18.25 v1(54,18.25)
  L1 (Sig) w0.4: U300.E1 U300.E2
  other v1: 11.75,2.25 11.75,3 11.75,3.75 54,16.25 55,16.25 54,17.25 55,17.25 55,18.25
DP24VS: C300.2 C301.2 C302.2 C307.2 C308.2 C309.2 CN401.1 CN401.2 CN401.3 CN401.4 CN401.5 CN401.6 CN401.7 CN401.8 EC300.1 EC302.1 R309.2 R310.2 SB300.2 U300.A3 U300.A4 U301.G1 U301.G2 U301.G3 U301.H1 U301.H2 U301.H3 | length 37.6
  L1 (Sig) w0.2: v1(9.575,12.225) 12.1,12.225 C300.2 ; R310.2 22.89,10.4 26.2,10.4
  L1 (Sig) w0.4: C301.2 14.15,12.25 U300.A3 U300.A4
  L1 (Sig) w0.6: C308.2@22.19,12.9 C308.2 ; C309.2 C309.2@24.19,12.9
  L1 (Sig) w0.8: C308.2@22.19,12.9 C309.2@24.19,12.9
  L1 (Sig) w1: C300.2 C301.2 ; C301.2@14.15,12.25 C302.2 18,12.25 18,13.2 19.94,13.2 C307.2 C308.2 ; R309.2 30.5,18.55 30.5,21.05 EC300.1 EC302.1
  L4 (Sig) w0.2: SB300.2 v1(9.575,12.225)
  other v1: 35.5,20.25 36.5,20.25 54,20.25 55,20.25 54,21.25 55,21.25 35.5,22 36.5,22 54,22.25 55,22.25
FUSE_IN: FH300.1 LED302.4 R301.2 | length 15.3
  L1 (Sig) w0.4: FH300.1@9.1,24.5 9.1,21.8 14.6,21.8 14.6,21.05 LED302.4
  L1 (Sig) w1: R301.2 6.4,22.9 8,24.5 9.1,24.5 9.9,24.5 FH300.1
FUSE_OUT: D300.1 FH300.2 R304.2 ZD300.2
GNDPWR: CN400.21 CN400.22 CN400.23 CN400.24 CN400.25 CN400.26 CN400.27 CN400.28 CN400.29 CN400.30 CN400.31 CN400.32 CN400.33 CN400.34 CN400.35 CN400.36 CN400.37 CN400.38 CN400.39 CN400.40 EC301.2 R303.1 R308.1 ZD300.1 | length 29.1
  L1 (Sig) w0.4: EC301.2 23.35,28.25 44.025,28.25 R303.1
  L1 (Sig) w1: R308.1 4.317,17 ZD300.1
  other v1: 4,7.5 5,7.5 4,8.5 5,8.5 4,9.5 5,9.5 4,10.5 5,10.5 4,11.5 5,11.5 4,12.5 5,12.5 20.5,25 21.5,25 20.5,26 21.5,26 20.5,27 21.5,27 20.5,28 21.5,28
IN24VS: CN400.1 CN400.2 CN400.3 CN400.4 CN400.5 CN400.6 CN400.7 CN400.8 CN400.9 CN400.10 CN400.11 CN400.12 CN400.13 CN400.14 CN400.15 CN400.16 CN400.17 CN400.18 CN400.19 CN400.20 R301.1
  other v1: 4,19 5,19 4,21.25 5,21.25 1,23.25 2.25,23.25 1,24.25 2.25,24.25
LTM8023_ADJ: R314.2 U301.H7 | length 2
  L1 (Sig) w0.4: R314.2 26.955,4.175 26.955,6.005 U301.H7
LTM8023_AUX/BIAS: U301.F5 U301.G5 | length 1.3
  L1 (Sig) w0.4: U301.G5 U301.F5
LTM8023_PGOOD: R312.1 TP301.1 U301.H6 | length 7.5
  L1 (Sig) w0.4: TP301.1 24.19,3.35 24.19,6.1 25.3,6.1 25.3,7.34 U301.H6
LTM8023_RT: R313.2 U301.G7 | length 2
  L1 (Sig) w0.4: U301.G7 28.39,5.97 28.39,4.21 R313.2
LTM8023_RUN/SS: C318.2 R310.1 SB301.2 U301.H5 | length 6.7
  L1 (Sig) w0.4: C318.2 24.19,8.735 ; R310.1 24.19,8.735 ; U301.H5 24.315,8.61 24.19,8.735
  L4 (Sig) w0.4: SB301.2 25.275,7.86 v1(25.275,8.6)
LTM8074_FB: R305.2 U300.D1 | length 4.9
  L1 (Sig) w0.2: R305.2 10.7,5.1 12,5.1 12,7.8 U300.D1
LTM8074_PGOOD: R302.1 TP300.1 U300.B1 | length 17.3
  L1 (Sig) w0.2: v1(10.7,1.4) 15.4,1.4 TP300.1 ; v1(10.7,7.4) R302.1 10.7,9.1 U300.B1
  L4 (Sig) w0.2: v1(10.7,1.4) v1(10.7,7.4)
LTM8074_RT: R306.2 U300.B5 | length 2.5
  L1 (Sig) w0.4: U300.B5 17.15,9.1 R306.2
LTM8074_RUN: R307.2 SB300.1 U300.A2 | length 5.3
  L1 (Sig) w0.2: R307.2 10.65,10.3 v1(11.625,10.3) 13.5,10.3 U300.A2
  L4 (Sig) w0.2: SB300.1 11.625,9.85 v1(11.625,10.3)
LTM8074_TR/SS: C306.2 U300.C1 | length 3.9
  L1 (Sig) w0.2: C306.2 11.6,6.65 11.6,8.45 U300.C1
NetLED300_2: LED300.2 R300.1 | length 2.5
  L1 (Sig) w0.4: R300.1 45.775,23.35 LED300.2
NetLED301_2: LED301.2 R303.2 | length 2.5
  L1 (Sig) w0.4: R303.2 45.775,25.6 LED301.2
NetLED302_1: LED302.1 R304.1 | length 2.6
  L1 (Sig) w0.4: LED302.1 16.85,20.25 R304.1
NetLED303_2: LED303.2 R311.1 | length 2.5
  L1 (Sig) w0.4: R311.1 45.775,21.1 LED303.2
NetLED304_2: LED304.2 R315.2 | length 2.5
  L1 (Sig) w0.4: R315.2 45.775,18.85 LED304.2
P24VS: D300.2 EC301.1 LED301.4 R309.1 | length 71.2
  L1 (Sig) w0.4: EC301.1@23.4,21.05 v1(25.925,21.05) ; v1(25.925,2.125) 49.861,2.125 49.886,2.1 v1(49.9,2.1) ; v1(49.9,27.1) 49.9,26.4 LED301.4
  L4 (Sig) w0.4: v1(25.925,2.125) v1(25.925,21.05) ; v1(49.9,2.1) v1(49.9,27.1)
pads on no net: CN400. CN401. LED300.1 LED300.3 LED301.1 LED301.3 LED302.2 LED302.3 LED303.1 LED303.3 LED304.1 LED304.3 U301.F7

## Polygon pours and split planes (outlines as drawn)
DGND on L1 (Sig) "DGND_L1 (Sig)" (solid, remove dead copper, pour order 47): 6.5,15 6.5,9.5 7.75,9.5 7.75,0.5 59.25,0.5 59.25,28.5 23,28.5 23,15
GNDPWR on L1 (Sig) "GNDPWR_L1 (Sig)" (solid, remove dead copper, pour order 45): 5.75,15.75 5.75,8.75 7,8.75 7,0.5 0.5,0.5 0.5,28.5 22.25,28.5 22.25,15.75
GNDPWR on L1 (Sig) "GNDPWR_L1 (Sig)" (solid, remove dead copper, pour order 37): 0.5,18 6.5,18 6.5,16 5.75,16 5.75,6.75 0.5,6.75
IN24VS on L1 (Sig) "IN24VS_L1 (Sig)" (solid, remove dead copper, pour order 36): 5.5,21.75 5.5,18.5 0.5,18.5 0.5,24.75 3,24.75 3,22 3.25,21.75
FUSE_IN on L1 (Sig) "FUSE_IN_L1 (Sig)" (solid, remove dead copper, pour order 35): 3.5,23.75 3.5,22.25 12.25,22.25 12.25,27 5.75,27 5.75,24.5 5,23.75
DP3.3VS on L1 (Sig) "DP3.3VS_L1 (Sig)" (solid, remove dead copper, pour order 3): 51,7.9 52.65,7.9 52.65,6.1 49.1,6.1 49.1,8.2 45.4,8.2 45.4,10.6 42.6,10.6 42.6,12.4 45.4,12.4 45.4,14.8 47.1,14.8 47.1,16.6 51,16.6
P24VS on L1 (Sig) "P24VS_L1 (Sig)" (solid, remove dead copper, pour order 28): 16.25,16.1 21.75,16.1 21.75,17.75 26.5,17.75 26.5,22.75 20,22.75 20,17.9 16.25,17.9
FUSE_OUT on L1 (Sig) "FUSE_OUT_L1 (Sig)" (solid, remove dead copper, pour order 27): 10.5,17.75 14.75,17.75 14.75,16 7.75,16 7.75,19.5 18,19.5 18,22.5 14.25,22.5 14.25,27 19.25,27 19.25,18.25 10.5,18.25
DGND on L1 (Sig) "DGND_L1 (Sig)" (solid, remove dead copper, pour order 26): 26.25,27.5 26.25,24.25 40,24.25 40,17.75 40,14.25 38.5,14.25 38.5,12.25 42,12.25 42,13 44.75,13 44.75,24.5 42.75,24.5 42.75,27.5
DGND on L1 (Sig) "DGND_L1 (Sig)" (solid, remove dead copper, pour order 25): 9.75,13.25 16.75,13.25 16.75,15.25 6.5,15.25 6.5,9.5 9.75,9.5
GNDPWR on L1 (Sig) "GNDPWR_L1 (Sig)" (solid, remove dead copper, pour order 23): 24.5,28.5 24.5,24.25 20,24.25 20,28.5
DP24VS on L1 (Sig) "DP24VS_L1 (Sig)" (solid, remove dead copper, pour order 0): 27.7,17.3 22.25,17.3 22.25,15.75 17.1,15.75 17.1,12.9 11.05,12.9 11.05,11.275 13.875,11.275 13.875,9.65 13.975,9.55 14.9,9.55 15,9.65 15,11 18.5,11 18.5,12.5 25.761,12.5 25.761,10.25 29.25,10.25 29.25,14.75 39.3,14.75 39.3,15.4 39.3,17.1 39.3,22.75 29.5,22.75 29.5,19.4 27.7,19.4
DP12VS on L1 (Sig) "DP12VS_L1 (Sig)" (solid, remove dead copper, pour order 5): 9.8,4 9.8,2 13.7,2 13.7,7.4 12.4,7.4 12.4,4
DGND on L1 (Sig) "DGND_L1 (Sig)" (solid, remove dead copper, pour order 4): 32.5,14.1 30.4,14.1 30.4,7.8 27.9,7.8 27.9,6.9 30.4,6.9 30.4,5.6 36.4,5.6 36.4,9.1 32.5,9.1
DP5VS on L1 (Sig) "DP5VS_L1 (Sig)" (solid, remove dead copper, pour order 2): 32.9,9.5 32.9,14.1 36.4,14.1 36.4,11.8 42.1,11.8 42.1,9.9 44.4,9.9 44.4,8.2 43.3,8.2 43.3,4.6 42,4.6 42,8.1 39.9,8.1 39.9,8.4 38.2,8.4 38.2,9.5
DGND on L1 (Sig) "DGND_L1 (Sig)" (solid, remove dead copper, pour order 1): 15.575,8.675 15.675,8.575 15.675,7.087 15.513,6.925 14.063,6.925 13.925,7.063 13.925,7.5 13.85,7.575 13.363,7.575 13.275,7.663 13.275,9.288 13.3,9.313 14.912,9.313 15.025,9.2 15.025,8.75 15.1,8.675
DGND on L4 (Sig) "DGND_L4 (Sig)" (solid, remove dead copper, pour order 48): 6.5,15 6.5,9.5 7.75,9.5 7.75,0.5 59.25,0.5 59.25,28.5 23,28.5 23,15
GNDPWR on L4 (Sig) "GNDPWR_L4 (Sig)" (solid, remove dead copper, pour order 46): 5.75,15.75 5.75,8.75 7,8.75 7,0.5 0.5,0.5 0.5,28.5 22.25,28.5 22.25,15.75
DP3.3VS on L4 (Sig) "DP3.3VS_L4 (Sig)" (solid, remove dead copper, pour order 34): 50.7,10.6 50.7,7.6 58.2,7.6 58.2,10.6
DP5VS on L4 (Sig) "DP5VS_L4 (Sig)" (solid, remove dead copper, pour order 33): 50.7,14.6 50.7,11.6 58.2,11.6 58.2,14.6
DP12VS on L4 (Sig) "DP12VS_L4 (Sig)" (solid, remove dead copper, pour order 32): 50.7,18.6 50.7,15.6 58.2,15.6 58.2,18.6
DP24VS on L4 (Sig) "DP24VS_L4 (Sig)" (solid, remove dead copper, pour order 31): 50.7,22.6 50.7,19.6 58.2,19.6 58.2,22.6
IN24VS on L4 (Sig) "IN24VS_L4 (Sig)" (solid, remove dead copper, pour order 30): 4.25,23.75 3.5,24.5 3.25,24.75 0.5,24.75 0.5,14.8 8.3,14.8 8.3,23.75
GNDPWR on L4 (Sig) "GNDPWR_L4 (Sig)" (solid, remove dead copper, pour order 29): 0.5,14.5 0.5,6.75 8.3,6.75 8.3,14.5
DGND on L2 (GND) "DGND_L2 (GND)" (solid, remove dead copper, pour order 40): 6.5,15 6.5,9.5 7.75,9.5 7.75,0.5 59.25,0.5 59.25,28.5 23,28.5 23,15
GNDPWR on L2 (GND) "GNDPWR_L2 (GND)" (solid, remove dead copper, pour order 39): 5.75,15.75 5.75,8.75 7,8.75 7,0.5 0.5,0.5 0.5,28.5 22.25,28.5 22.25,15.75
DP3.3VS on L3 (PWR) "DP3.3VS_L3 (PWR)" (solid, remove dead copper, pour order 44): 45.5,10.5 45.5,7.75 55.5,7.75 55.5,10.5
DP5VS on L3 (PWR) "DP5VS_L3 (PWR)" (solid, remove dead copper, pour order 43): 33,9.75 36.25,9.75 36.25,11.75 55.5,11.75 55.5,14.5 33,14.5
DP12VS on L3 (PWR) "DP12VS_L3 (PWR)" (solid, remove dead copper, pour order 42): 9.6,1.75 13.3,1.75 13.3,15.75 55.5,15.75 55.5,18.5 9.6,18.5
DP24VS on L3 (PWR) "DP24VS_L3 (PWR)" (solid, remove dead copper, pour order 41): 35,22.5 35,19.75 55.5,19.75 55.5,22.5

## Keep-outs
Keep-Out Layer:
  the board outline again, w0.1

## Silkscreen, mask and mechanical layers (free items; w line width, h text height)
Top Overlay:
  text "DP24V" at 51.692,25.25 h1.52
  text "DP12V" at 51.692,23 h1.52
  text "DP5V" at 51.692,20.75 h1.52
  text "FUSE" at 6,19.9 h1.52
  text "DP3.3V" at 51.692,18.5 h1.52
  text "Power Module (Type-A / Rev.B)" at 35.5,2.58 h1.75
  text "Designed by Ganghyeok Lim" at 43.25,0.986 h1.25
Bottom Overlay:
  drawing of 23 lines, arcs and shapes, not listed
Mechanical 13:
  lines w0.1: 39.873,36.027 59.373,36.027 ; 40,39 59.5,39 ; 40,42 59.5,42 ; 40,45 59.5,45 ; 43.5,33 43.5,45 ; 65.873,36.027 85.373,36.027 ; 65.873,39.027 85.373,39.027 ; 66,3.033 115.25,3.033 ; 66,6.027 115.25,6.027 ; 66,9.033 115.25,9.033 ; 66,12.027 115.25,12.027 ; 66,15.027 115.25,15.027 ; 66,18.027 115.25,18.027 ; 66,21.027 115.25,21.027 ; 66,24 115.25,24 ; 66,27.033 115.25,27.033 ; 66,30.027 115.25,30.027 ; 66,33.027 115.25,33.027 ; 66,36.027 115.25,36.027 ; 66,39.027 115.25,39.027 ; 66,42 85.5,42 ; 66,42.027 115.25,42 ; 66,45.027 115.25,45.027 ; 66,48.033 115.25,48.033 ; 66,51.027 115.25,51.027 ; 66,54.027 115.25,54.027 ; 66,57.027 115.25,57.027 ; 66,60.027 115.25,60.027 ; 66,63 115.25,63 ; 66,66 115.25,66 ; 66,69 89.5,69 ; 69.5,0 69.5,69 ; 89.5,0 89.5,69 ; 115.25,69 89.5,69
  lines w0.254: 40,33 59.5,33 59.5,48 40,48 40,33 ; 66,0 115.25,0 115.25,72 66,72 66,0
  text "# PCB Specification (JLCPCB)" at 67,69.876 h2
  text "Category" at 76.611,67.143 h1.52
  text "No" at 67,67.016 h1.52
  text "Selection" at 99.351,67.009 h1.52
  text "1" at 67.593,64 h1.52
  text "Base Material" at 70.611,64.01 h1.52
  text "FR-4" at 90.75,64 h1.52
  text "Layer #" at 70.611,61.137 h1.52
  text "4 - Layer" at 90.75,61.143 h1.52
  text "2" at 67.479,61 h1.52
  text "59.75(mm) * 29.00(mm)" at 90.75,58.146 h1.52
  text "3" at 67.483,58.018 h1.52
  text "Dimension" at 70.611,58.018 h1.52
  text "Thickness" at 70.611,55.01 h1.52
  text "1.6T" at 90.75,55.018 h1.52
  text "4" at 67.457,55 h1.52
  text "5" at 67.479,52.018 h1.52
  text "Color" at 70.611,52.003 h1.52
  text "Black" at 90.75,52.002 h1.52
  text "Material Type" at 70.611,49.154 h1.52
  text "6" at 67.481,49.018 h1.52
  text "FR4-Standard TG 135-140" at 90.75,49.012 h1.52
  text "HASL(with lead)" at 90.75,46.263 h1.52
  text "7" at 67.487,46 h1.52
  text "Surface Finish" at 70.611,45.995 h1.52
  text "# Layer Information" at 41,45.876 h2
  text "Top (Signal / GND)" at 44.5,43.137 h1.52
  text "8" at 67.486,43.018 h1.52
  text "No" at 90.75,43.016 h1.52
  text "L1" at 41.1,43 h1.52
  text "Gold Thickness" at 70.611,43.012 h1.52
  text "Outer Copper Weight" at 70.611,40.146 h1.52
  text "L2" at 41.1,40 h1.52
  text "GND" at 44.5,40.003 h1.52
  text "9" at 67.481,40.018 h1.52
  text "1 oz" at 90.75,40.017 h1.52
  text "Inner Copper Weight" at 70.611,37.146 h1.52
  text "L3" at 41.1,37.018 h1.52
  text "10" at 67.137,37.018 h1.52
  text "0.5 oz" at 90.75,37.018 h1.52
  text "Power" at 44.5,36.875 h1.52
  text "Bottom (Signal / GND)" at 44.5,34.137 h1.52
  text "Impedance Control" at 70.611,34.128 h1.52
  text "L4" at 41.1,34 h1.52
  text "11" at 67.214,34 h1.52
  text "No" at 90.75,34.01 h1.52
  text "Layer Stack-up" at 70.611,31.137 h1.52
  text "Default Stack-up" at 90.75,31.119 h1.52
  text "12" at 67.138,31 h1.52
  text "Via Covering" at 70.611,28.146 h1.52
  text "Plugged" at 90.75,28.146 h1.52
  text "13" at 67.132,28.018 h1.52
  text "14" at 67.119,25 h1.52
  text "Min. Via Hole Size / Diameter" at 70.611,25.003 h1.52
  text "Hole : 0.3mm   /   Diameter : 0.45mm" at 90.75,25.003 h1.52
  text "±0.2mm (Regular)" at 90.75,22.146 h1.52
  text "15" at 67.124,22.018 h1.52
  text "Board Outline Tolerance" at 70.611,22.012 h1.52
  text "16" at 67.127,19.018 h1.52
  text "No" at 90.75,19.018 h1.52
  text "Confirm Production File" at 70.611,19.011 h1.52
  text "17" at 67.133,16 h1.52
  text "Remove Order Number" at 70.611,16.003 h1.52
  text "Yes" at 90.749,16.01 h1.52
  text "Flying Probe Test" at 70.611,13.154 h1.52
  text "Fully Test" at 90.75,13.154 h1.52
  text "18" at 67.134,13.018 h1.52
  text "Gold Fingers" at 70.611,10.146 h1.52
  text "19" at 67.135,10.018 h1.52
  text "No" at 90.75,10.018 h1.52
  text "30° Finger Chamfered" at 70.611,7.146 h1.52
  text "20" at 67.1,7.018 h1.52
  text "No" at 90.75,7.018 h1.52
  text "Castellated Holes" at 70.611,4.002 h1.52
  text "No" at 90.75,4.01 h1.52
  text "21" at 67.177,4 h1.52
  text "Edge Plating" at 70.611,1.145 h1.52
  text "No" at 90.75,1.01 h1.52
  text "22" at 67.101,1 h1.52

## Dimensions
0,-1 to 59.75,-1 on Mechanical 13
0.5,0 to 60.5,29 on Mechanical 13

## Text inside footprints (layer, text, board x,y; h text height)
LED300: Mechanical 13 "R" at 50.893,23.509 h0.5 r180; Mechanical 13 "+" at 50.861,24.307 h0.5 r180; Mechanical 13 "B" at 47.184,24.309 h0.5 r180; Mechanical 13 "G" at 47.199,23.509 h0.5 r180
LED301: Mechanical 13 "R" at 50.893,25.759 h0.5 r180; Mechanical 13 "+" at 50.861,26.557 h0.5 r180; Mechanical 13 "B" at 47.184,26.559 h0.5 r180; Mechanical 13 "G" at 47.199,25.759 h0.5 r180
LED302: Mechanical 13 "B" at 11.834,21.209 h0.5 r180; Mechanical 13 "G" at 11.849,20.409 h0.5 r180; Mechanical 13 "+" at 15.511,21.207 h0.5 r180; Mechanical 13 "R" at 15.543,20.409 h0.5 r180
LED303: Mechanical 13 "R" at 50.893,21.259 h0.5 r180; Mechanical 13 "+" at 50.861,22.057 h0.5 r180; Mechanical 13 "B" at 47.184,22.059 h0.5 r180; Mechanical 13 "G" at 47.199,21.259 h0.5 r180
LED304: Mechanical 13 "R" at 50.893,19.009 h0.5 r180; Mechanical 13 "+" at 50.861,19.807 h0.5 r180; Mechanical 13 "B" at 47.184,19.809 h0.5 r180; Mechanical 13 "G" at 47.199,19.009 h0.5 r180
U300: Top Overlay "E" at 11.59,7 h0.5; Top Overlay "D" at 11.59,7.65 h0.5; Top Overlay "C" at 11.57,8.281 h0.5; Top Overlay "B" at 11.58,8.95 h0.5; Top Overlay "A" at 11.55,9.6 h0.5; Top Overlay "1" at 12.775,10.775 h0.5; Top Overlay "2" at 13.375,10.775 h0.5; Top Overlay "4" at 14.65,10.775 h0.5; Top Overlay "5" at 15.325,10.781 h0.5; Top Overlay "3" at 14.025,10.781 h0.5
U301: Top Overlay "A" at 35.585,15.18 h0.8 r270; Top Overlay "B" at 34.315,15.18 h0.8 r270; Top Overlay "C" at 33.054,15.18 h0.8 r270; Top Overlay "D" at 31.775,15.18 h0.8 r270; Top Overlay "E" at 30.505,15.18 h0.8 r270; Top Overlay "F" at 29.235,15.18 h0.8 r270; Top Overlay "G" at 27.974,15.18 h0.8 r270; Top Overlay "H" at 26.695,15.18 h0.8 r270; Top Overlay "2" at 37.465,12.61 h0.8 r270; Top Overlay "1" at 37.465,13.88 h0.8 r270; Top Overlay "3" at 37.474,11.34 h0.8 r270; Top Overlay "4" at 37.465,10.07 h0.8 r270; Top Overlay "5" at 37.474,8.8 h0.8 r270; Top Overlay "6" at 37.474,7.53 h0.8 r270; Top Overlay "7" at 37.465,6.26 h0.8 r270